# Altium PCB PCB1.PcbDoc
Units mm, origin at the board's own origin, x right, y up, seen from the top; angles counter-clockwise.
Board outline 152.4 x 101.6 mm, 2 copper layers (Top Layer, Bottom Layer); 7 components, 4 nets, 14 pads, 18 vias.
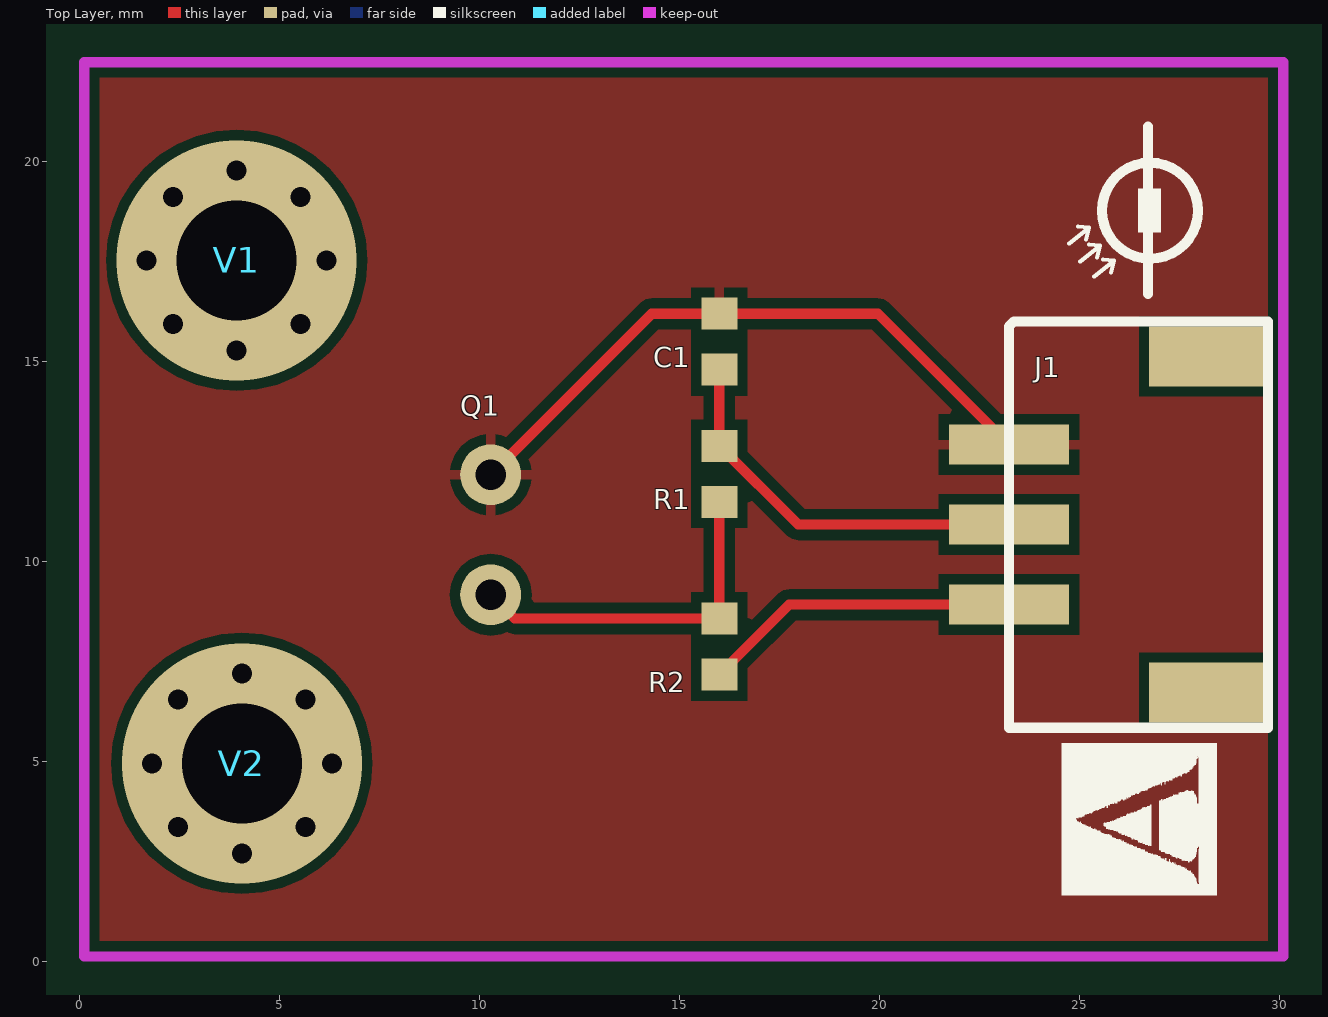
[diagram p0: Top Layer view]
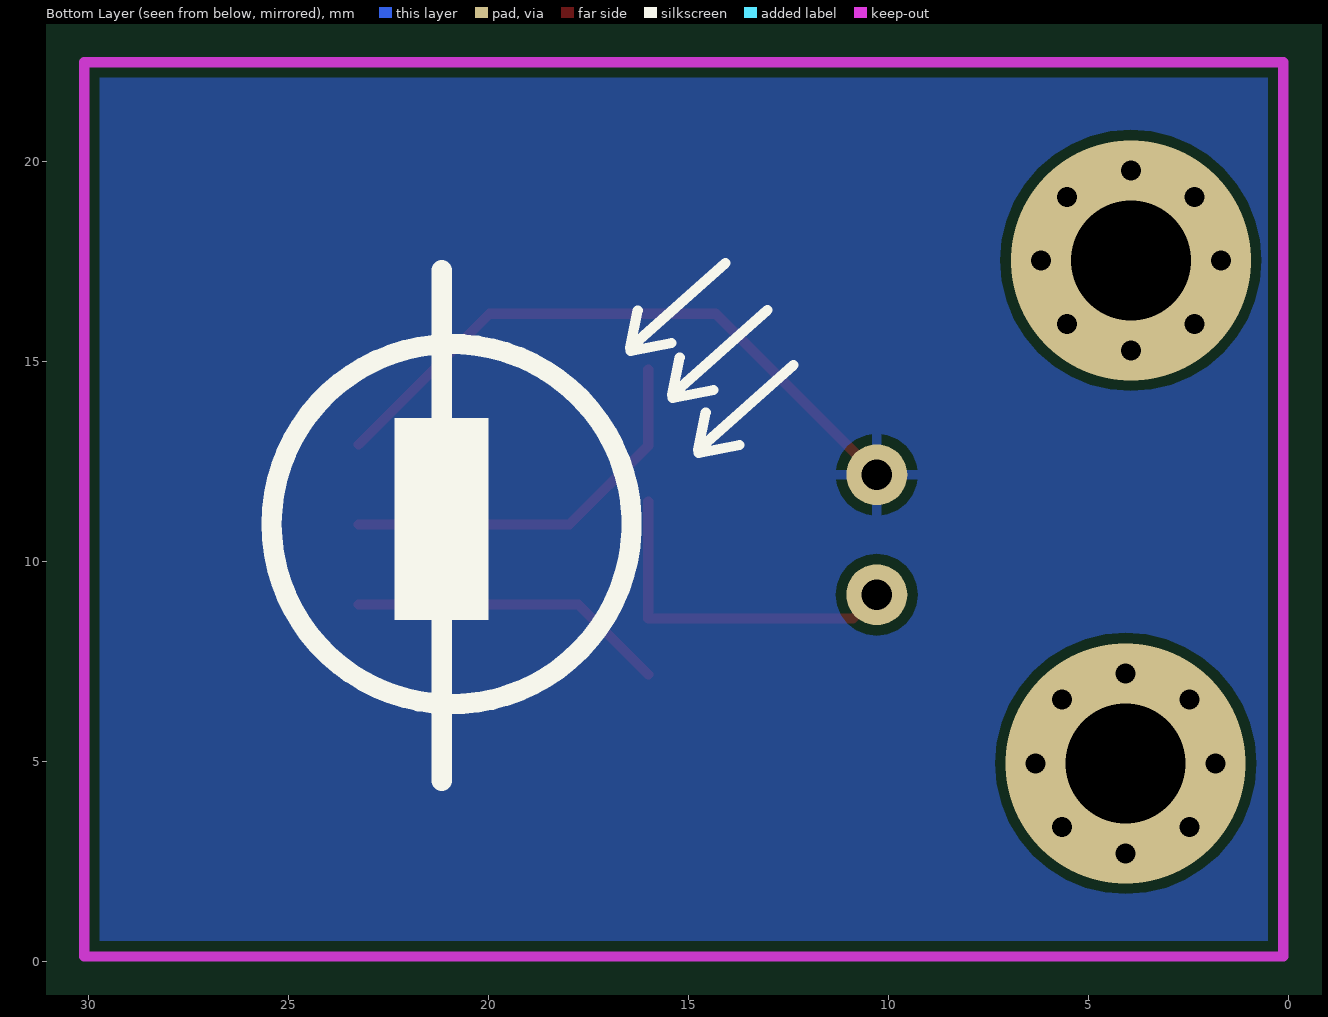
[diagram p1: Bottom Layer view, seen from below]

## Layer stack, top to bottom
Top Layer: signal copper 0.0356
Dielectric: dielectric 0.32, FR-4, Dk 4.8
Bottom Layer: signal copper 0.0356

## Board outline
-87.249,-33.528 65.151,-33.528 65.151,68.072 -87.249,68.072

## Design rules (kind name [scope] priority, off if disabled: settings)
Clearance [All] p1: gap=0.254
PolygonConnect [All] p1: connectstyle=Relief reliefconductorwidth=0.254 reliefentries=4 polygonreliefangle="90 Angle"
RoutingVias [All] p1: holewidth=0.711 width=1.27 viastyle="Through Hole" minholewidth=0.711 minwidth=1.27 maxholewidth=0.711 maxwidth=1.27
SilkscreenOverComponentPads [All] p1: minsilkscreentomaskgap=0.254
SolderMaskExpansion [All] p1: expansion=0.102
Width [All] p1: maxlimit=0.254 minlimit=0.254 preferedwidth=0.254
27 further rules are at their usual default settings.

## Components (designator, comment, footprint, x,y, rotation, side; value= is the part's Value field where it differs from the comment)
C1 "Cap" 1608[0603] 16.002,15.494 r270 top
J1 "sh-2.0" sh-2.0 23.241,10.922 r90 top (schematic designator *1)
Q1 "Photo NPN" Q 10.287,10.668 r90 top
R1 "10K" 1608[0603] 16.002,12.192 r270 top
R2 "470" 1608[0603] 16.002,7.874 r90 top
V1 "Via" VIA 3.937,17.526 r0 top
V2 "Via" VIA 4.064,4.953 r0 top

## Footprints (in the part's own frame and the unit in brackets; to place one, negate y for a bottom-side part, rotate by r counter-clockwise, add the part's x,y. Pads: shape width x height; smd on the part's side, far side on the other; paste and mask are expansions set on the pad)
1608[0603] [mm] "Chip Capacitor, Body 1.6x0.8mm, IPC High Density"
  rect 0.8x0.9 smd: 1(-0.7,0) 2(0.7,0)
  body extent -0.87,-0.48 0.87,0.48, height 1.3
Q [mil]
  round 60 hole 30: 1(-59.06,0) 2(59.06,0)
sh-2.0 [mm]
  rect 1x3 smd: 1(-2,0) 2(0,0) 3(2,0) 3(2,0)
  rect 1.5x3 smd: GND(-4.2,-5) GND(4.2,-5)
  silkscreen extent -5.08,-6.48 5.08,0
VIA [mm]

## Part data
C1: "Capacitor"
Q1: "NPN Phototransistor"
R1 R2: library part Res3, "Resistor"

## Via types
v1: diameter 1, hole 0.5, Top Layer to Bottom Layer, 16 vias
v2: diameter 6, hole 3, Top Layer to Bottom Layer, 2 vias

## Nets (pads, with @x,y where several pads share a name; then routed paths per layer and width w, separated by ;. In a path a pad name is that pad's centre, name@x,y a point inside that pad or via, vN(x,y) a via of type N, cw(c..) or ccw(c..) an arc to the next point about the centre after c; other vN are vias at no path point)
GND: C1.1 J1.3 Q1.2 | length 16
  Top Layer w0.254: Q1.2 14.313,16.194 C1.1 19.969,16.194 J1.3@23.241,12.922
NetJ1_2: J1.1 R2.1 | length 8
  Top Layer w0.254: R2.1 17.75,8.922 J1.1
NetQ1_1: Q1.1 R1.2 R2.2 | length 8.9
  Top Layer w0.254: Q1.1 10.881,8.574 R2.2 R1.2
VCC: C1.2 J1.2 R1.1 | length 10
  Top Layer w0.254: C1.2 R1.1 17.972,10.922 J1.2
pads on no net: J1.GND
copper on no net:
  other v1: 4.064,2.703 2.473,3.362 5.655,3.362 1.814,4.953 6.314,4.953 2.473,6.544 5.655,6.544 4.064,7.203 3.937,15.276 2.346,15.935 5.528,15.935 1.687,17.526 6.187,17.526 2.346,19.117 5.528,19.117 3.937,19.776
  other v2: 4.064,4.953 3.937,17.526

## Polygon pours and split planes (outlines as drawn)
GND on Top Layer "Top Layer-No Net" (solid, pour order 10): 0.127,22.479 30.099,22.479 30.099,0.127 0.127,0.127
GND on Bottom Layer "Top Layer-No Net" (solid, pour order 12): 0.127,22.479 30.099,22.479 30.099,0.127 0.127,0.127

## Keep-outs
Keep-Out Layer:
  lines w0.254: 0.127,0.127 30.099,0.127 30.099,22.479 0.127,22.479 0.127,0.127

## Silkscreen, mask and mechanical layers (free items; w line width, h text height)
Top Overlay:
  drawing of 1217 lines, arcs and shapes, not listed
Bottom Overlay:
  circle w0.508: c20.916,10.935 r4.501
  region: 22.341,8.536 22.341,13.586 19.991,13.586 19.991,8.536
  lines w0.254: 12.366,14.911 14.754,12.786 14.564,13.721 ; 13.016,16.286 15.404,14.161 15.214,15.096 ; 13.716,12.911 14.739,12.711 ; 14.066,17.461 16.454,15.336 16.264,16.271 ; 14.366,14.286 15.389,14.086 ; 15.416,15.461 16.439,15.261
  lines w0.508: 21.166,4.511 21.166,17.286
Top Solder:
  text "Analog Ambient" at 9.271,3.175 h1
  text "Light Sensor" at 9.271,1.778 h1